# EAGLE board rf_tx (EAGLE 6.5.0)
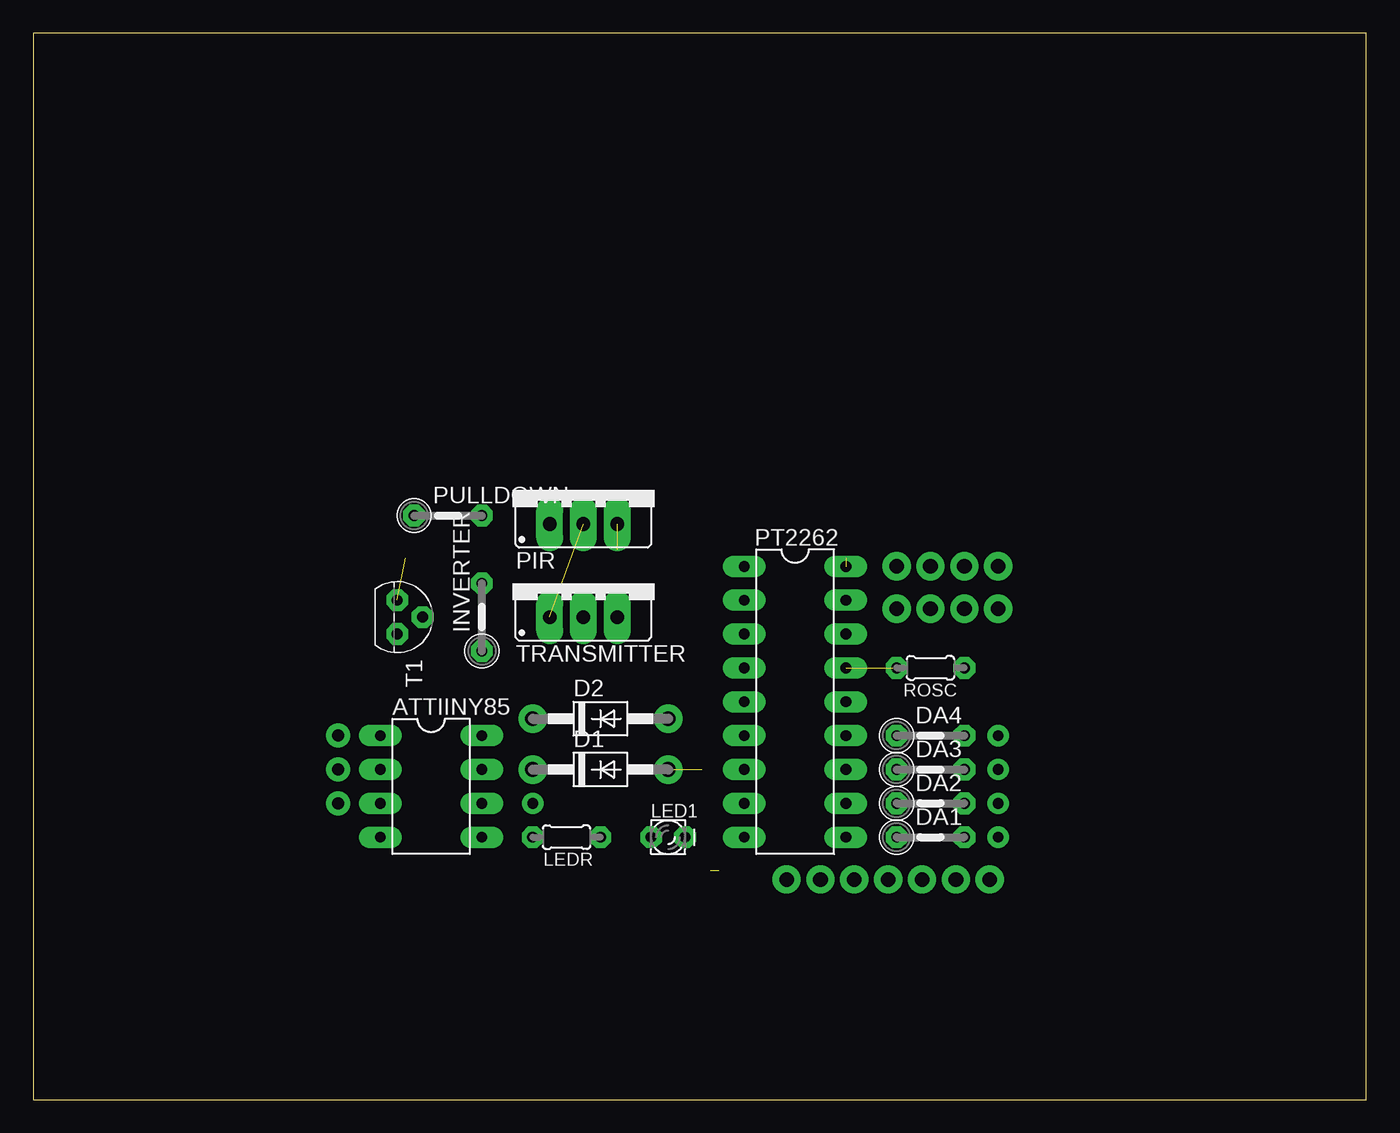
[diagram p0: board, top side]
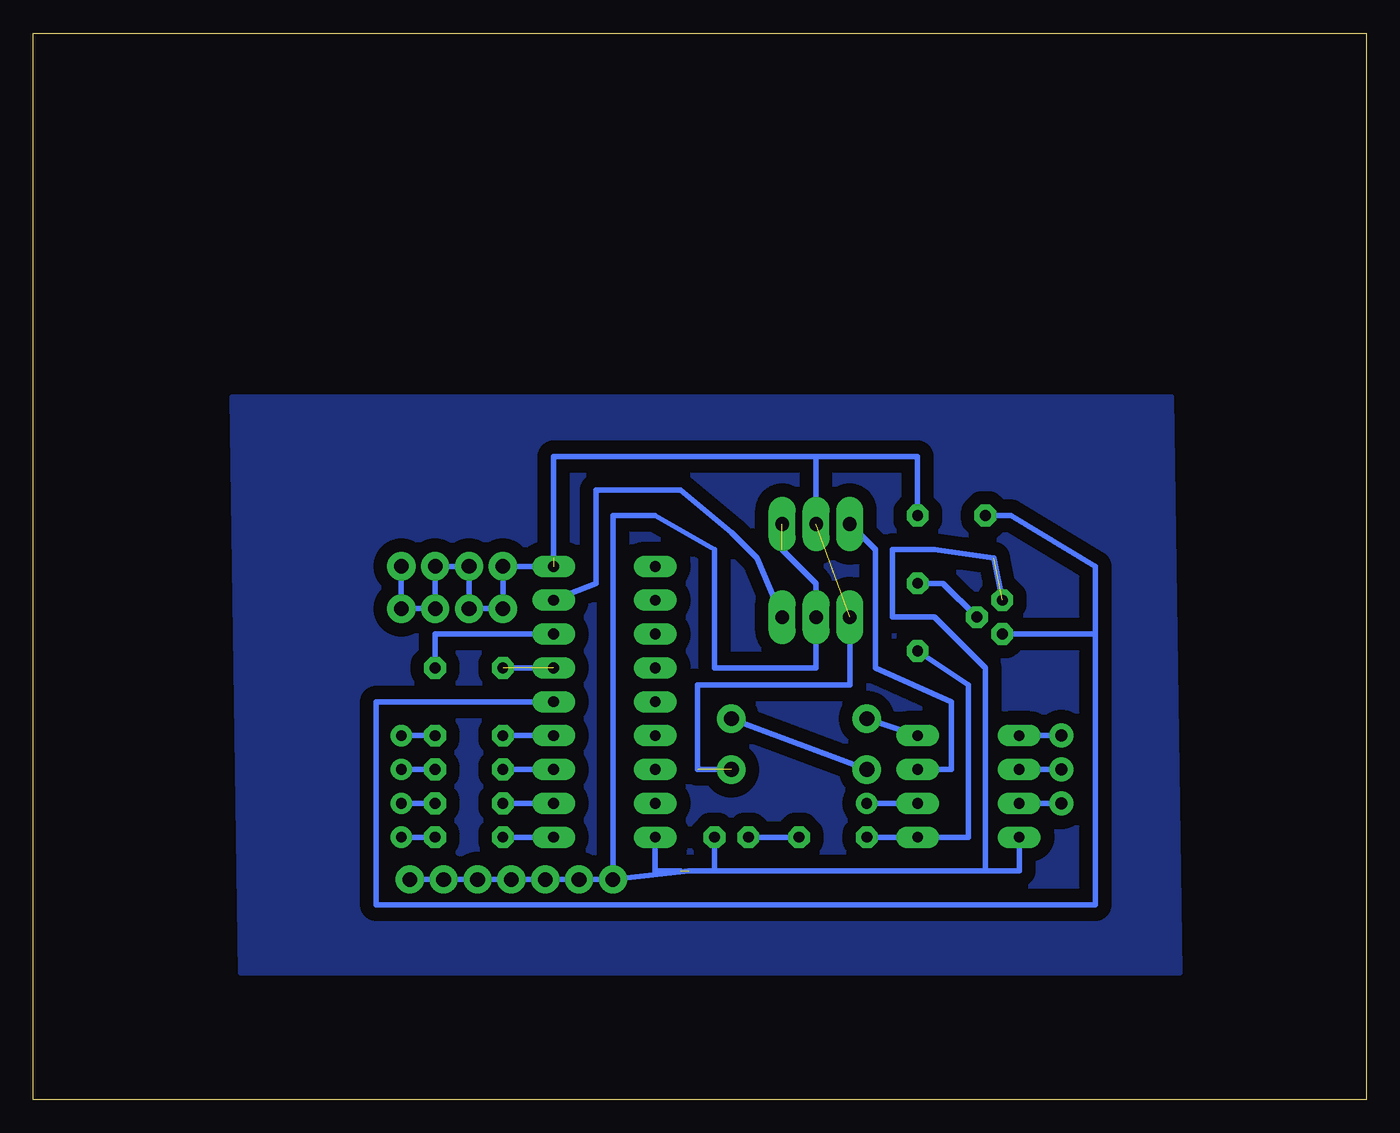
[diagram p1: board, bottom side, seen from below]

Size 100 x 80 mm. Coordinates in mm from the lower left corner, seen from the top.
Outline: 0,0 100,0 100,80 0,80 0,0
Copper layers (1*16): Top 0.035mm / dielectric 1.5mm / Bottom 0.035mm
Design rules "default *": minimum track width 10mil, minimum drill 24mil, track to track 8mil, track to pad 8mil, pad to pad 8mil, via to via 8mil, smd to smd 8mil, copper to edge 40mil, drill to drill 8mil, minimum pad ring 10mil, minimum via ring 8mil, stop-mask expansion 4mil, vias tented up to drill 0mil, thermal gap 10mil

## Footprints (pad centres in the part's own frame; a part is rotated, then mirrored left to right if it is on the bottom)
DIL08 = drill 0.813 long: 1 -3.81,-3.81; 2 -1.27,-3.81; 3 1.27,-3.81; 4 3.81,-3.81; 5 3.81,3.81; 6 1.27,3.81; 7 -1.27,3.81; 8 -3.81,3.81
DO41-10 = drill 1.118: A 5.08,0; C -5.08,0
0207/5V = drill 0.813 octagon: 1 -2.54,0; 2 2.54,0
LED_LD260 = drill 0.813 octagon: A -1.27,0; K 1.27,0
0204/5 = drill 0.813 octagon: 1 -2.54,0; 2 2.54,0
337TS = drill 1.016 long: 1 -2.54,-2.54; 2 0,-2.54; 3 2.54,-2.54
DIL18 = drill 0.813 long: 1 -10.16,-3.81; 2 -7.62,-3.81; 3 -5.08,-3.81; 4 -2.54,-3.81; 5 0,-3.81; 6 2.54,-3.81; 7 5.08,-3.81; 8 7.62,-3.81; 9 10.16,-3.81; 10 10.16,3.81; 11 7.62,3.81; 12 5.08,3.81; 13 2.54,3.81; 14 0,3.81; 15 -2.54,3.81; 16 -5.08,3.81; 17 -7.62,3.81; 18 -10.16,3.81
TO92 = drill 0.813 octagon: 1 1.27,0; 2 0,1.905; 3 -1.27,0

## Placement (x,y rotation side)
ATTIINY85  [DIL08]  29.84,23.5 270 top
D1  1N4004  [DO41-10]  42.55,24.77 0 top
D2  1N4004  [DO41-10]  42.55,28.57 0 top
DA1  1k  [0207/5V]  67.31,19.68 0 top
DA2  1k  [0207/5V]  67.31,22.23 0 top
DA3  1k  [0207/5V]  67.31,24.77 0 top
DA4  1k  [0207/5V]  67.31,27.3 0 top
INVERTER  1k  [0207/5V]  33.66,36.2 90 top
LED1  [LED_LD260]  47.62,19.68 0 top
LEDR  1k  [0204/5]  40.01,19.68 180 top
PIR  [337TS]  41.27,45.72 0 top
PT2262  [DIL18]  57.15,29.84 270 top
PULLDOWN  1M  [0207/5V]  31.11,43.81 0 top
ROSC  1M  [0204/5]  67.31,32.38 180 top
T1  2N3904  [TO92]  27.3,36.2 270 top
TRANSMITTER  [337TS]  41.27,38.73 0 top

## Library data of the parts
ATTIINY85 PT2262 = ic-package
D1 D2 = diode
DA1-DA4 INVERTER LEDR PULLDOWN = rcl
LED1 = eagle-ltspice; SPICEMODEL: NONE; SPICEPREFIX: D; SPICETYPE: diode
PIR TRANSMITTER = v-reg
ROSC = resistor
T1 = transistor

## Nets
GND: ATTIINY85.4 LED1.K PIR.3 PT2262.9 T1.3 TRANSMITTER.2
N$1: D1.C D2.A
N$2: ATTIINY85.8 D2.C
N$3: PT2262.1
N$4: PT2262.2
N$5: PT2262.3
N$6: PT2262.4
N$7: PT2262.5
N$8: PT2262.6
N$9: PT2262.7
N$10: PT2262.8
N$11: DA4.2
N$12: INVERTER.2 T1.2
N$14: DA3.2
N$15: DA2.2
N$16: DA1.2
N$17: ATTIINY85.2
N$18: ATTIINY85.7 PIR.1
N$19: LED1.A LEDR.1
N$21: ATTIINY85.1
N$22: PT2262.17 TRANSMITTER.3
N$23: PT2262.16 ROSC.1
N$24: PT2262.15 ROSC.2
N$25: ATTIINY85.6
N$27: ATTIINY85.3
N$34: DA1.1 PT2262.10
N$35: DA3.1 PT2262.12
N$36: DA2.1 PT2262.11
N$37: DA4.1 PT2262.13
N$43: ATTIINY85.5 INVERTER.1 LEDR.2
NOTTE: PT2262.14 PULLDOWN.1 T1.1
VCC: D1.A PIR.2 PT2262.18 PULLDOWN.2 TRANSMITTER.1

## Tracks (layer width: path | path; a pad name or v marks a point on that pad's centre or on a via)
GND  (via drill 1.1)  (3 unrouted)
  Bottom 0.406: 28.57,17.14 26.04,17.14 ATTIINY85.4 | 28.57,17.14 48.9,17.14 | 48.9,17.14 50.8,17.14 v56.52,16.51 | v56.52,16.51 56.52,43.81 53.34,43.81 48.9,41.27 48.9,32.38 41.27,32.38 TRANSMITTER.2 41.27,38.73 43.81,41.27 PIR.3 | 28.57,17.14 28.57,32.38 32.38,36.2 35.56,36.2 35.56,41.27 32.38,41.27 27.94,40.64 T1.3 | v56.52,16.51 v59.05,16.51 v61.59,16.51 v64.14,16.51 | 64.77,16.51 v64.14,16.51 | v64.14,16.51 v66.67,16.51 v69.22,16.51 v71.75,16.51 | 51.44,17.14 53.34,17.14 PT2262.9 | LED1.K 48.9,17.14
N$1
  Bottom 0.406: D1.C D2.A
N$2
  Bottom 0.406: D2.C ATTIINY85.8
N$11  (via drill 0.8)
  Bottom 0.406: DA4.2 v72.39,27.3
N$12
  Bottom 0.406: INVERTER.2 31.75,38.73 T1.2
N$14  (via drill 0.8)
  Bottom 0.406: DA3.2 v72.39,24.77
N$15  (via drill 0.8)
  Bottom 0.406: DA2.2 v72.39,22.23
N$16  (via drill 0.8)
  Bottom 0.406: DA1.2 v72.39,19.68
N$17  (via drill 0.9)
  Bottom 0.406: v22.86,24.77 ATTIINY85.2
N$18
  Bottom 0.406: ATTIINY85.7 31.11,24.77 31.11,29.84 36.83,32.38 36.83,41.27 PIR.1
N$19
  Bottom 0.406: LEDR.1 LED1.A
N$20
  pour Bottom (isolate 1.016): 13.97,9.53 14.61,52.7 85.09,52.7 84.45,9.53
N$21  (via drill 0.9)
  Bottom 0.406: 24.13,27.3 ATTIINY85.1 v22.86,27.3
N$22
  Bottom 0.406: PT2262.17 57.78,38.73 57.78,45.72 51.44,45.72 47.62,42.55 45.72,40.64 TRANSMITTER.3
N$23
  Bottom 0.406: PT2262.16 69.85,34.92 ROSC.1
N$24  (1 unrouted)
  Bottom 0.406: PT2262.15 ROSC.2
N$25  (via drill 0.8)
  Bottom 0.406: ATTIINY85.6 v37.47,22.23
N$27  (via drill 0.9)
  Bottom 0.406: v22.86,22.23 ATTIINY85.3
N$34
  Bottom 0.406: DA1.1 PT2262.10
N$35
  Bottom 0.406: DA3.1 PT2262.12
N$36
  Bottom 0.406: PT2262.11 DA2.1
N$37
  Bottom 0.406: PT2262.13 DA4.1
N$43
  Bottom 0.406: LEDR.2 ATTIINY85.5 29.84,19.68 29.84,31.11 INVERTER.1
NOTTE
  Bottom 0.406: PT2262.14 74.3,29.84 74.3,14.61 20.32,14.61 20.32,34.92 | 20.32,34.92 T1.1 | 20.32,34.92 20.32,40.01 26.67,43.81 PULLDOWN.1
VCC  (via drill 1.1)  (3 unrouted)
  Bottom 0.406: 41.27,48.26 33.66,48.26 PULLDOWN.2 | 41.27,48.26 PIR.2 | 41.27,48.26 60.96,48.26 60.96,40.64 | PT2262.18 v64.77,40.01 v64.77,36.83 v67.31,36.83 v67.31,40.01 | 67.94,40.01 v67.31,40.01 | v67.31,40.01 v69.85,40.01 | 69.85,39.37 v69.85,40.01 | v69.85,40.01 v69.85,36.83 | 69.85,36.2 v69.85,36.83 | v69.85,36.83 v72.39,36.83 | v72.39,36.83 73.03,36.83 | v72.39,40.01 v72.39,36.83 | TRANSMITTER.1 38.73,31.11 50.16,31.11 50.16,24.77 D1.A